# Altium PCB Sensor_board.PcbDoc
Units mil, origin at the board's own origin, x right, y up, seen from the top; angles counter-clockwise.
Board outline 3930 x 1861.13 mil, 2 copper layers (Top Layer, Bottom Layer); 47 components, 36 nets, 152 pads, 31 vias.
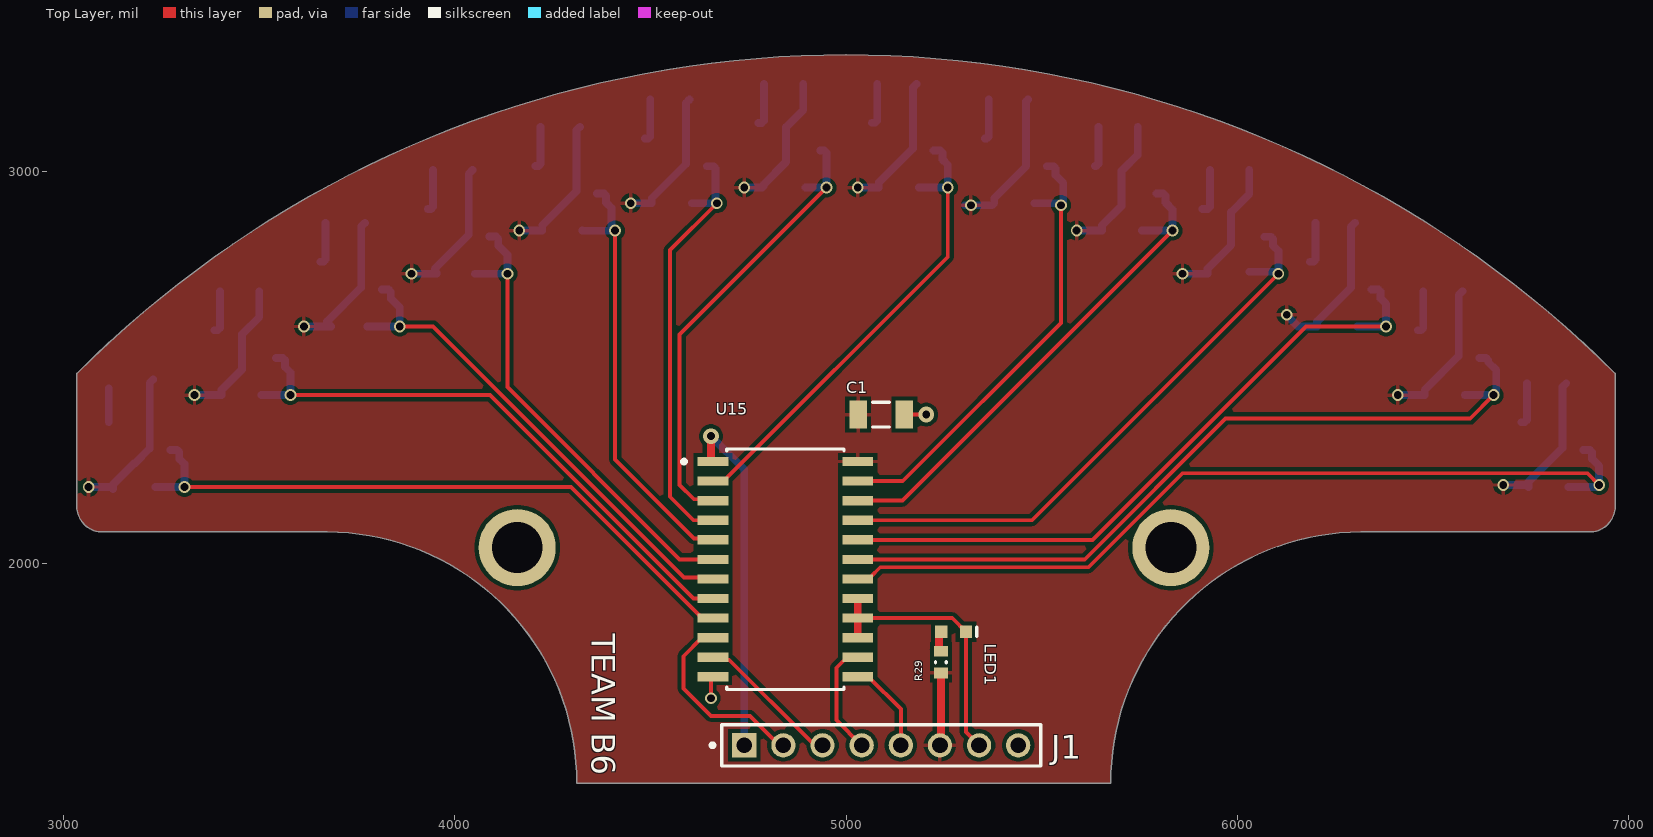
[diagram p0: Top Layer view]
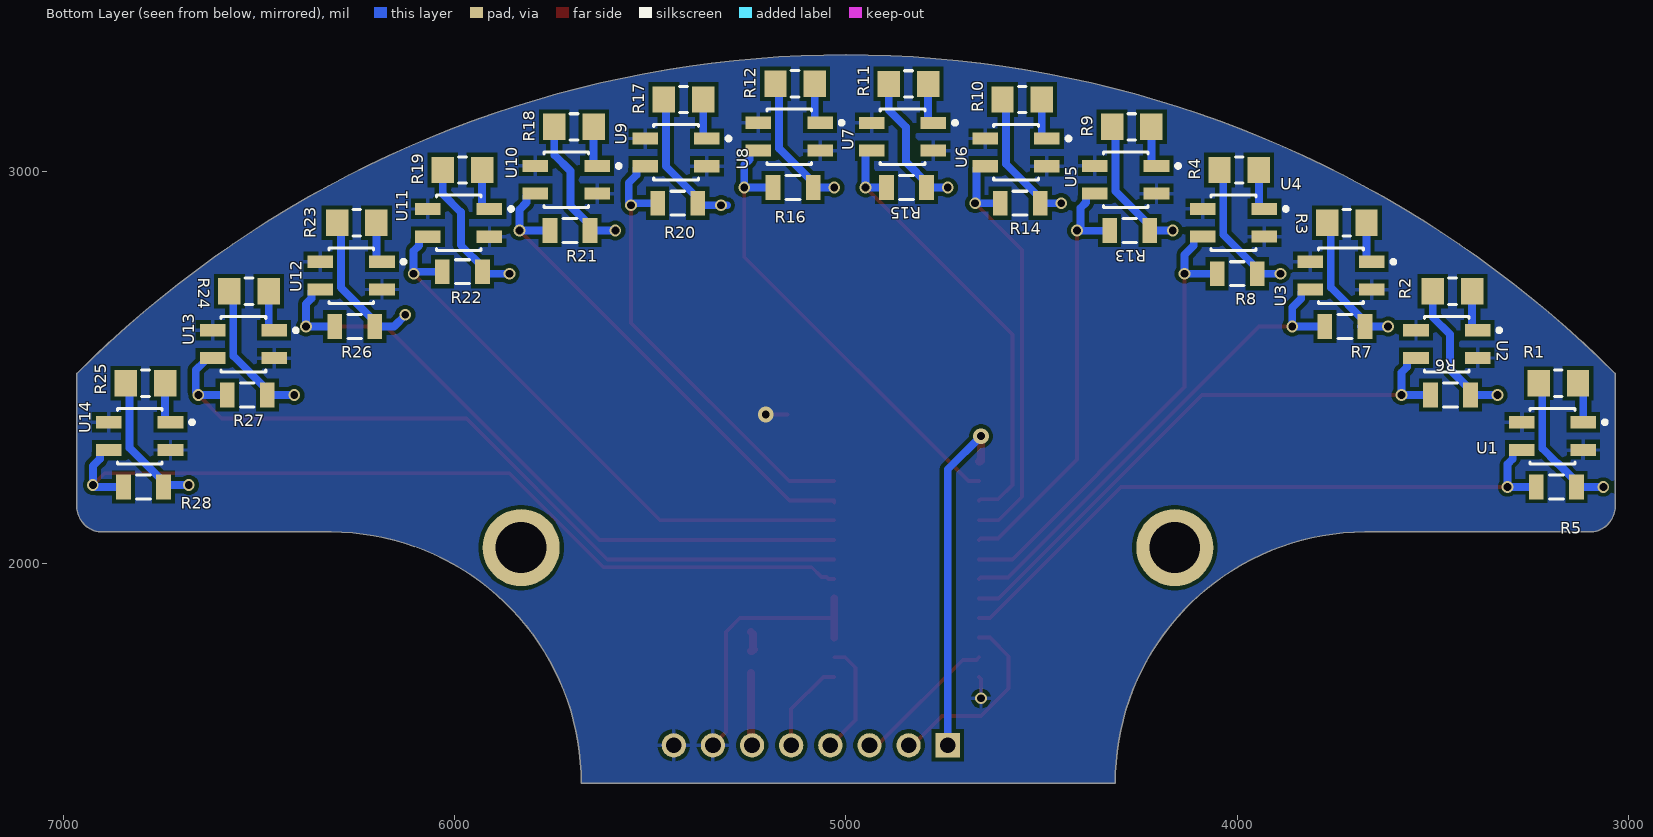
[diagram p1: Bottom Layer view, seen from below]
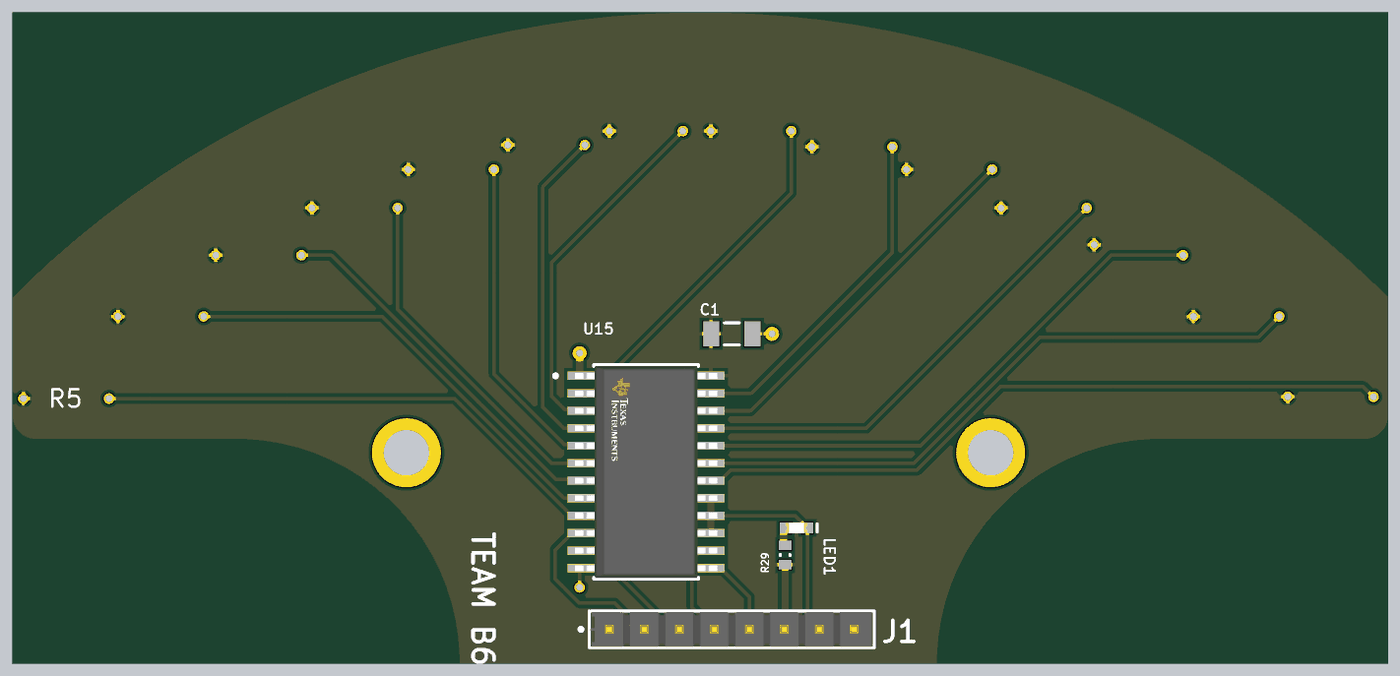
[diagram p2: 3D render of the assembled board from above, using the file's embedded part models]
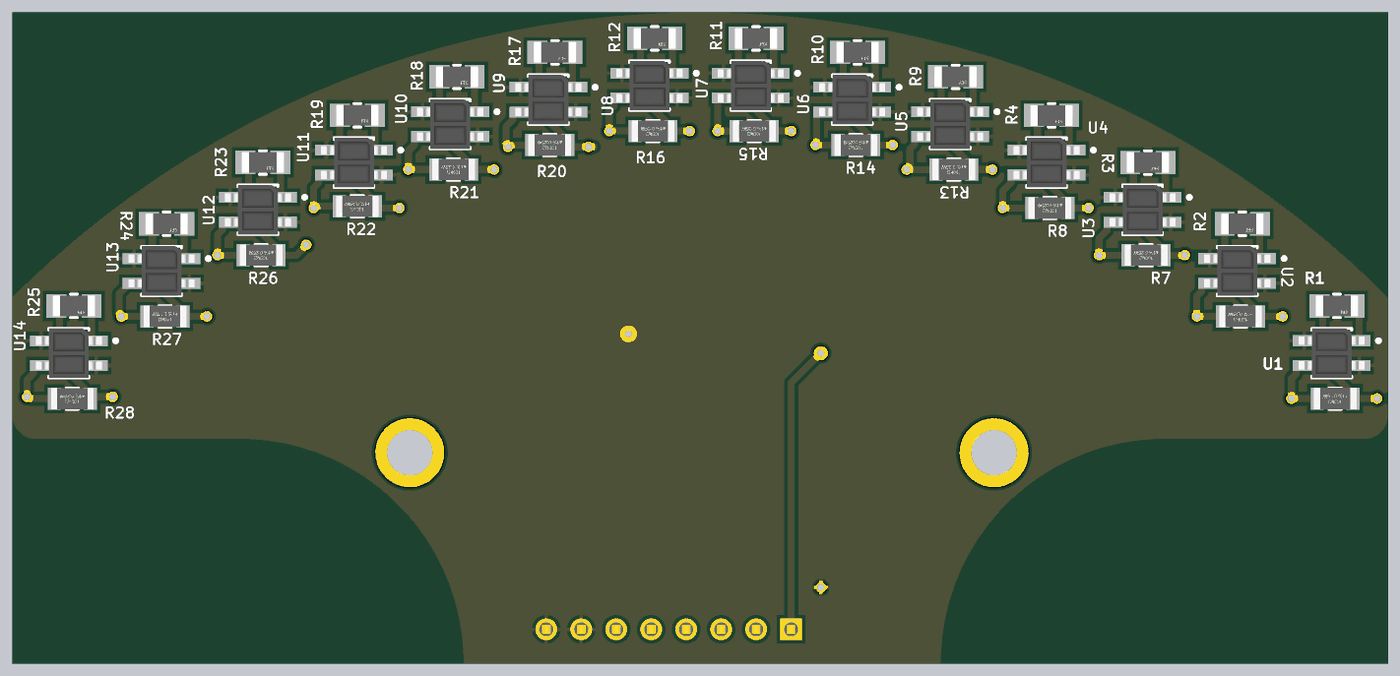
[diagram p3: 3D render of the assembled board from below, using the file's embedded part models]

## Layer stack, top to bottom
Top Solder: solder mask 0.4, Solder Resist, Dk 3.5
Top Layer: signal copper 1.4
Dielectric 1: dielectric 12.6, FR-4, Dk 4.8
Bottom Layer: signal copper 1.4
Bottom Solder: solder mask 0.4, Solder Resist, Dk 3.5

## Board outline
3035,2145 ccw(c3100,2145) 3100,2080 3675,2080 cw(c3672.5,1440.3) 4312.2,1437.8 5676.18,1437.8 cw(c6316.69,1439.49) 6315,2080 6900,2080 ccw(c6900,2145) 6965,2145 6965,2485 ccw(c5000,520) 3035,2485

## Design rules (kind name [scope] priority, off if disabled: settings)
Clearance [All] p1: gap=10 ignorepadtopadclearanceinfootprint=FALSE
PolygonConnect [All] p1: connectstyle=Relief reliefconductorwidth=10 reliefentries=4 polygonreliefangle="90 Angle" airgapwidth=10
RoutingVias [All] p1: holewidth=28 width=50 viastyle="Through Hole" minholewidth=28 minwidth=50 maxholewidth=28 maxwidth=50
SolderMaskExpansion [All] p1: expansion=4 istentingtop=FALSE
SupplyNets "Schematic Supply Nets_15" [InNet('sense_8')] p1: voltage=0.000
SupplyNets "Schematic Supply Nets_14" [InNet('sense_14')] p2: voltage=0.000
SupplyNets "Schematic Supply Nets_13" [InNet('sense_5')] p3: voltage=0.000
SupplyNets "Schematic Supply Nets_12" [InNet('sense_9')] p4: voltage=0.000
SupplyNets "Schematic Supply Nets_11" [InNet('GND')] p5: voltage=0.000
SupplyNets "Schematic Supply Nets_10" [InNet('sense_13')] p6: voltage=0.000
SupplyNets "Schematic Supply Nets_9" [InNet('+5')] p7: voltage=0.000
SupplyNets "Schematic Supply Nets_8" [InNet('sense_6')] p8: voltage=0.000
SupplyNets "Schematic Supply Nets_7" [InNet('sense_3')] p9: voltage=0.000
SupplyNets "Schematic Supply Nets_6" [InNet('sense_1')] p10: voltage=0.000
SupplyNets "Schematic Supply Nets_5" [InNet('sense_12')] p11: voltage=0.000
SupplyNets "Schematic Supply Nets_4" [InNet('sense_2')] p12: voltage=0.000
SupplyNets "Schematic Supply Nets_3" [InNet('sense_4')] p13: voltage=0.000
SupplyNets "Schematic Supply Nets_2" [InNet('sense_7')] p14: voltage=0.000
SupplyNets "Schematic Supply Nets_1" [InNet('sense_11')] p15: voltage=0.000
SupplyNets "Schematic Supply Nets" [InNet('sense_10')] p16: voltage=0.000
Width [All] p1: maxlimit=30 minlimit=10 preferedwidth=10
30 further rules are at their usual default settings.

## Classes and differential pairs
component class board: C1 J1 LED1 R29 U15

## Components (designator, comment, footprint, x,y, rotation, side; value= is the part's Value field where it differs from the comment)
C1 "CAP 100nF 100V 1206(3216)" CAPC1206(3216)150_N 5090,2380 r0 top value=100nF
J1 "TSW-108-08-G-S" FP-TSW-108-08-G-S-MFG 5090,1535 r0 top
LED1 "2V 20mA 0603 Red" 0603_A 5275,1825 r180 top
R1 "RNCP1206FTD200R" FP-RNCP1206-IPC_B 3180,2460 r0 bottom
R2 "RNCP1206FTD200R" FP-RNCP1206-IPC_B 3450.45,2694.84 r0 bottom
R3 "RNCP1206FTD200R" FP-RNCP1206-IPC_B 3720.45,2869.84 r0 bottom
R4 "RNCP1206FTD200R" FP-RNCP1206-IPC_B 3995.45,3004.84 r0 bottom
R5 "CRGCQ1206J10K" FP-CRGCQ1206-IPC_C 3185,2195 r0 bottom value=10KΩ
R6 "CRGCQ1206J10K" FP-CRGCQ1206-IPC_C 3455.45,2429.84 r0 bottom value=10KΩ
R7 "CRGCQ1206J10K" FP-CRGCQ1206-IPC_C 3725.45,2604.84 r0 bottom value=10KΩ
R8 "CRGCQ1206J10K" FP-CRGCQ1206-IPC_C 4000.45,2739.84 r0 bottom value=10KΩ
R9 "RNCP1206FTD200R" FP-RNCP1206-IPC_B 4270,3115 r0 bottom
R10 "RNCP1206FTD200R" FP-RNCP1206-IPC_B 4550,3185 r0 bottom
R11 "RNCP1206FTD200R" FP-RNCP1206-IPC_B 4840.45,3224.84 r0 bottom
R12 "RNCP1206FTD200R" FP-RNCP1206-IPC_B 5130,3225 r0 bottom
R13 "CRGCQ1206J10K" FP-CRGCQ1206-IPC_C 4275,2850 r0 bottom value=10KΩ
R14 "CRGCQ1206J10K" FP-CRGCQ1206-IPC_C 4555,2920 r0 bottom value=10KΩ
R15 "CRGCQ1206J10K" FP-CRGCQ1206-IPC_C 4845.45,2959.84 r0 bottom value=10KΩ
R16 "CRGCQ1206J10K" FP-CRGCQ1206-IPC_C 5135,2960 r0 bottom value=10KΩ
R17 "RNCP1206FTD200R" FP-RNCP1206-IPC_B 5415,3185 r0 bottom
R18 "RNCP1206FTD200R" FP-RNCP1206-IPC_B 5695,3115 r0 bottom
R19 "RNCP1206FTD200R" FP-RNCP1206-IPC_B 5980,3005 r0 bottom
R20 "CRGCQ1206J10K" FP-CRGCQ1206-IPC_C 5430,2920 r0 bottom value=10KΩ
R21 "CRGCQ1206J10K" FP-CRGCQ1206-IPC_C 5705,2850 r0 bottom value=10KΩ
R22 "CRGCQ1206J10K" FP-CRGCQ1206-IPC_C 5980,2745 r0 bottom value=10KΩ
R23 "RNCP1206FTD200R" FP-RNCP1206-IPC_B 6250,2870 r0 bottom
R24 "RNCP1206FTD200R" FP-RNCP1206-IPC_B 6525,2695 r0 bottom
R25 "RNCP1206FTD200R" FP-RNCP1206-IPC_B 6790,2460 r0 bottom
R26 "CRGCQ1206J10K" FP-CRGCQ1206-IPC_C 6255,2605 r0 bottom value=10KΩ
R27 "CRGCQ1206J10K" FP-CRGCQ1206-IPC_C 6529.68,2429.84 r0 bottom value=10KΩ
R28 "CRGCQ1206J10K" FP-CRGCQ1206-IPC_C 6794.68,2194.84 r0 bottom value=10KΩ
R29 "150R 5% 0603(1608)" RESC0603(1608)_L 5242.44,1747.56 r270 top value="150.00 Ohm"
U1 "QRE1113GR" FP-100CY-MFG 3195,2325 r0 bottom
U2 "QRE1113GR" FP-100CY-MFG 3465,2560 r0 bottom
U3 "QRE1113GR" FP-100CY-MFG 3735.45,2734.84 r0 bottom
U4 "QRE1113GR" FP-100CY-MFG 4010,2870 r0 bottom
U5 "QRE1113GR" FP-100CY-MFG 4285.45,2979.84 r0 bottom
U6 "QRE1113GR" FP-100CY-MFG 4565.45,3049.84 r0 bottom
U7 "QRE1113GR" FP-100CY-MFG 4855.45,3089.84 r0 bottom
U8 "QRE1113GR" FP-100CY-MFG 5145,3090 r0 bottom
U9 "QRE1113GR" FP-100CY-MFG 5434.09,3049.84 r0 bottom
U10 "QRE1113GR" FP-100CY-MFG 5714.68,2979.84 r0 bottom
U11 "QRE1113GR" FP-100CY-MFG 5989.68,2869.84 r0 bottom
U12 "QRE1113GR" FP-100CY-MFG 6264.23,2735 r0 bottom
U13 "QRE1113GR" FP-100CY-MFG 6539.68,2559.84 r0 bottom
U14 "QRE1113GR" FP-100CY-MFG 6804.68,2324.84 r0 bottom
U15 "CD74HC4067M96" FP-DW0024A-MFG 4845,1985 r0 top

## Footprints (in the part's own frame and the unit in brackets; to place one, negate y for a bottom-side part, rotate by r counter-clockwise, add the part's x,y. Pads: shape width x height; smd on the part's side, far side on the other; paste and mask are expansions set on the pad)
0603_A [mm] "Chip LED, 2-Leads, Body 1.6x0.8mm, IPC Medium Density"
  rect 0.8x0.8 smd: 1(-0.8,0) 2(0.8,0)
  silkscreen extent -1.5,-0.3 -1.5,0.3, body extent -0.8,-0.4 0.8,0.4, height 0.7
CAPC1206(3216)150_N [mm] "Chip Capacitor, Body 3.2x1.6mm, Height 1.5mm, IPC Medium Density"
  rect 1.15x1.8 smd: 1(-1.5,0) 2(1.5,0)
  silkscreen extent -0.55,-0.8 0.55,0.8, body extent -1.7,-0.9 1.7,0.9, height 1.5
FP-100CY-MFG [mm]
  rect 1.66x0.79 smd paste+0 mask+0: 1(-2,-0.9) 2(2,-0.9) 3(2,0.9) 4(-2,0.9)
  silkscreen extent -3.52,-1.8 1.45,1.8, body extent -2.4,-1.8 2.4,1.8, height 1.85
FP-CRGCQ1206-IPC_C [mil]
  rect 37.64x63.38 smd paste+0 mask+0: 1(-51.22,0) 2(51.22,0)
  silkscreen extent -18,-31 18,31, body extent -61,-31 61,31, height 26
FP-DW0024A-MFG [mm]
  rect 2x0.6 smd paste-1000 mask+0: 1(-4.7,6.985) 2(-4.7,5.715) 3(-4.7,4.445) 4(-4.7,3.175) 5(-4.7,1.905) 6(-4.7,0.635) 7(-4.7,-0.635) 8(-4.7,-1.905) 9(-4.7,-3.175) 10(-4.7,-4.445) 11(-4.7,-5.715) 12(-4.7,-6.985) 13(4.7,-6.985) 14(4.7,-5.715) 15(4.7,-4.445) 16(4.7,-3.175) 17(4.7,-1.905) 18(4.7,-0.635) 19(4.7,0.635) 20(4.7,1.905) 21(4.7,3.175) 22(4.7,4.445) 23(4.7,5.715) 24(4.7,6.985)
  silkscreen extent -6.7,-7.8 3.8,7.8, body extent -5.8,-7.98 5.8,7.98, height 0.25
FP-RNCP1206-IPC_B [mil]
  rect 57.26x67.17 smd paste+0 mask+0: 1(-50.23,0) 2(50.23,0)
  silkscreen extent -10,-34 10,34, body extent -61,-30 61,30, height 26
FP-TSW-108-08-G-S-MFG [mm]
  rect 1.57x1.57 hole 1.02 paste-2539.97 mask+0: 1(-8.89,0)
  round 1.57 hole 1.02 paste-2539.97 mask+0: 2(-6.35,0) 3(-3.81,0) 4(-1.27,0) 5(1.27,0) 6(3.81,0) 7(6.35,0) 8(8.89,0)
  silkscreen extent -11.07,-1.34 10.35,1.34, body extent -10.45,-1.44 10.45,1.44, height 0.25
RESC0603(1608)_L [mm] "Chip Resistor, Body 1.6x0.8mm, IPC High Density"
  rect 0.7x0.9 smd: 1(-0.7,0) 2(0.7,0)
  silkscreen extent -0.05,-0.35 0.05,0.35, body extent -0.85,-0.47 0.85,0.47, height 0.6

## Part data
C1: library part CMP-1037-04212-1, "CAP 100nF 100V ±10% 1206 (3216 Metric) Thickness 1.45mm SMD", Case-EIA=1206, Case-Metric=3216, Rated Voltage="100 V", Tolerance=Â±10%, Max Thickness="1.45 mm", Technology=SMT
J1: library part CMP-02766-000001-1, "CONN HEADER VERT 8POS 2.54MM", Manufacturer=Samtec, Temperature="-55°C to +125°C", Temperature Range High=+125°C, Temperature Range Low=-55°C, Automotive=No, Category=Conn, ComponentLink2Description=Datasheet, ComponentLink2URL=http://suddendocs.samtec.com/catalog_english/tsw_th.pdf, Conn Gender=Male, Conn Orientation=Straight, Contact Material=Gold,Nickel, Device Class L1=Connectors, Device Class L2="Headers and Wire Housings", Device Class L3=unset, Digikey Description="CONN HEADER VERT 8POS 2.54MM", Footprint Url=http://suddendocs.samtec.com/prints/tsw-xxx-xx-x-x-xx-xxx-footprint.pdf, Height=8.71mm, Lead Free=Yes, Manufacturer Part Number=TSW-108-08-G-S, Mouser Description="TSW - Samtec 2.54mm Pin Header 13.46mm Overall Pin Length 5.08mm Tail", Number Of Contacts=8, Number Of Rows=1, Octopart=https://octopart.com/tsw-108-08-g-s-samtec-272653, Package=TSW-108-08-G-S, Pitch=2.54mm, RoHS=TRUE
LED1: library part CMP-1426-00001-1, "SMD mono-color Chip LED, WL-SMCW, Red", Color=Red, Manufacturer="Wuerth Elektronik", PartNumber=150060RS75000, ComponentLink1Description="Manufacturer URL", ComponentLink1URL=http://www.we-online.com, ComponentLink2Description=Datasheet, ComponentLink2URL=http://katalog.we-online.com/led/datasheet/150060RS75000.pdf, PackageReference=0603_A
R1 R2 R3 R4 R9 R10 R11 R12 R17 R18 R19 R23 R24 R25: library part CMP-26527-001516-1, "200Ω ±1% 0.5W 1206 High Power Anti-Sulfur Thin Film Chip Resistor", Case Code (Imperial)=1206, Case Code (Metric)=3216, Max Operating Temperature=155°C, Max Power Dissipation=500mW, Min Operating Temperature=-55°C, Resistance=200R, Resistor Type="Thin Film", Temperature Coefficient=100ppm/°C, Tolerance=1%, Case/Package=1206, Features="Moisture Resistant", Height=0.024inch, Lead Free="Lead Free", Length=0.122inch, Mount="Surface Mount", Number of Terminations=2, Packaging="Tape and Reel", RoHS Compliant=Yes, Series=RNCP, Width=0.059inch
R5 R6 R7 R8 R13 R14 R15 R16 R20 R21 R22 R26 R27 R28: library part CMP-03211-002305-1, "CRGCQ1206 10KΩ 0.25W 5% ±100ppm/°C 200V", Ambient Temperature Range High=+70°C, Manufacturer="TE Connectivity", Package=CRGCQ1206, Power Rating=0.25W, Resistance=10KΩ, Temperature="-55°C to +155°C", Temperature Coefficient=±100ppm/°C, Temperature Range High=+155°C, Temperature Range Low=-55°C, Tolerance=0.05, Voltage Rating=200V, Automotive=Yes, Automotive Grade="Grade 914", Category=Res, ComponentLink2Description=Datasheet, ComponentLink2URL=https://www.te.com/commerce/DocumentDelivery/DDEController?Action=showdoc&DocId=Data+Sheet%7F1773204-3%7F1%7Fpdf%7FEnglish%7FENG_DS_1773204-3_1.pdf%7F4-2176347-923, Composition="Thick Film", Device Class L1="Passive Components", Device Class L2=Resistors, Device Class L3="Chip SMD Resistors", Height=0.65mm, Ipc Land Pattern Name=RESC310155X55, Lead Free=Yes, Manufacturer Part Number=CRGCQ1206J10K, Octopart=https://octopart.com/crgcq1206j10k-te+connectivity-91018305, RoHS=TRUE, Series=CRGCQ
R29: library part CMP-1012-00054-1, "150R 0.1W 5% 0603 (1608 Metric)  SMD", Case-EIA=0603, Case-Metric=1608, Power="0.1 W", Tolerance="5 %", Technology=SMT
U1 U2 U3 U4 U5 U6 U7 U8 U9 U10 U11 U12 U13 U14: library part CMP-2000-06919-2, "SENSOR OPTO TRANS REFL SMD PHOTO", Case/Package=SMD/SMT, Collector Emitter Breakdown Voltage=30V, Forward Current=50mA, Forward Voltage=1.2V, Max Collector Current=20mA, Max Operating Temperature=85°C, Max Power Dissipation=75mW, Min Operating Temperature=-40°C, Operating Supply Voltage=1.7V, Package Quantity=1000, Reverse Breakdown Voltage=5V, Collector Emitter Voltage (VCEO)=30V, Contact Plating=Tin, Fall Time=20us, Height=1.7mm, Input Current=50mA, Lead Free="Lead Free", Length=3.6mm, Max Breakdown Voltage=30V, Mount="Surface Mount", Number of Channels=1, Number of Elements=1, Number of Pins=4, Output Type=Phototransistor, Packaging="Tape and Reel", Power Dissipation=75mW, Radiation Hardening=No, REACH SVHC="No SVHC", Response Time=20us, Reverse Voltage (DC)=5V, Rise Time=20us, Sensing Distance=0.197inch, Wavelength=940nm, Weight=0.078g, Width=2.9mm
U15: library part CMP-04901-000007-1, "IC MUX/DEMUX 1X16 24SOIC", Ambient Temperature Range High=+125°C, Ambient Temperature Range Low=-55°C, Manufacturer="Texas Instruments", Max Junction Temp=+150°C, Max Supply Voltage=6V, Min Supply Voltage=2V, Package=DW0024A, Quiescent Current=8uA, Temperature="-55°C to +125°C", Automotive=No, Category=IC, ComponentLink2Description=Datasheet, ComponentLink2URL=http://www.ti.com/lit/ds/symlink/cd74hc4067.pdf, Device Class L1="Integrated Circuits (ICs)", Device Class L2="Logic ICs", Device Class L3=Multiplexers, Digikey Description="IC MUX/DEMUX 1X16 24SOIC", Height=2.65mm, Ipc Land Pattern Name=SOIC127P1030X265-24, Lead Free=Yes, Logic Function Desc=Non-Inverting, Manufacturer Part Number=CD74HC4067M96, Mouser Description="Multiplexer Switch ICs Hi-Spd CMOS 16Ch Anl Mltplxr/Demltplxr", Number Of Circuits=1, Number Of Inputs=16, Number Of Outputs=1, Octopart=https://octopart.com/cd74hc4067m96-texas+instruments-722802, Propagation Delay=6ns, RoHS=TRUE, Standoff Height=0.1mm, Temperature Range High=+125°C, Temperature Range Low=-55°C

## Free pads (board coordinates)
  round 196.85 hole 130 unplated: M3(4160,2040) M3(5830,2040)

## Via types
v1: diameter 30, hole 20, Top Layer to Bottom Layer, 29 vias
v2: diameter 40, hole 20, Top Layer to Bottom Layer, 2 vias

## Nets (pads, with @x,y where several pads share a name; then routed paths per layer and width w, separated by ;. In a path a pad name is that pad's centre, name@x,y a point inside that pad or via, vN(x,y) a via of type N, cw(c..) or ccw(c..) an arc to the next point about the centre after c; other vN are vias at no path point)
+5: C1.1 J1.6 R1.2 R2.2 R3.2 R4.2 R5.1 R6.1 R7.1 R8.1 R9.2 R10.2 R11.2 R12.2 R13.1 R14.1 R15.1 R16.1 R17.2 R18.2 R19.2 R20.1 R21.1 R22.1 R23.2 R24.2 R25.2 R26.1 R27.1 R28.1 R29.2 U15.24 | length 5379.7
  Top Layer w20: J1.6 5242.44,1537.44 R29.2
  Bottom Layer w20: v1(3065,2195) R5.1@3122.01,2195 ; R5.1@3127.01,2190 3127.01,2201.1 3181.07,2255.16 3182.59,2255.16 3221.06,2293.64 3221.06,2460.83 R1.2@3230.23,2470 ; v1(3335.45,2429.84) R6.1 3404.23,2442.71 3456.86,2495.34 3456.86,2585.07 3500.68,2628.89 R2.2 ; v1@3615.45,2604.84 R7.1 3684.23,2604.84 3680.46,2609.68 3674.23,2617.71 3761.51,2704.99 3761.51,2860.67 R3.2 ; v1@3885.45,2739.84 R8.1 3954.23,2739.84 3953.57,2741.53 3949.23,2752.71 4036.06,2839.54 4036.06,2995.22 R4.2 ; v1(4165,2850) R13.1 4223.78,2862.87 4311.51,2950.6 4311.51,3106.28 R9.2 ; v1(4450,2920) R14.1 4503.78,2932.87 4591.51,3020.6 4591.51,3176.28 R10.2 ; v1(4740,2960) 4785.41,2960 4789.06,2963.66 4789.06,2967.54 4846.86,3025.34 4846.86,3114.46 4890.68,3158.27 R11.2 ; v1(5030,2960) R16.1 5083.78,2972.87 5171.06,3060.16 5171.06,3215.83 R12.2 ; v1@5304.09,2914.84 v1(5319.09,2914.84) 5373.61,2914.84 R20.1 5378.78,2932.87 5460.15,3014.24 5460.15,3179.92 R17.2 ; v1(5589.23,2850) R21.1 5653.78,2862.87 5703.91,2913.01 5703.91,3002.28 5745.23,3043.59 R18.2 ; v1(5859.68,2739.84) 5923.61,2739.84 5923.61,2752.71 5983.91,2813.01 5983.91,2897.28 6030.23,2943.59 R19.2 ; v1(6126.05,2634.84) 6126.05,2633.75 6154.96,2604.84 6203.61,2604.84 R26.1 6203.78,2617.87 6290.29,2704.39 6290.29,2860.06 R23.2 ; v1(6409.68,2429.84) R27.1 6478.46,2442.71 6565.74,2529.99 6565.74,2685.51 R24.2 ; v1(6679.23,2200) R28.1@6738.29,2200 ; R28.1 6743.46,2207.71 6830.74,2294.99 6830.74,2450.51 R25.2
  other v1: 3615,2605 3890,2740
GND: C1.2 J1.7 J1.8 LED1.1 U1.2 U1.4 U2.2 U2.4 U3.2 U3.4 U4.2 U4.4 U5.2 U5.4 U6.2 U6.4 U7.2 U7.4 U8.2 U8.4 U9.2 U9.4 U10.2 U10.4 U11.2 U11.4 U12.2 U12.4 U13.2 U13.4 U14.2 U14.4 U15.12 U15.15 U15.16 U15.17 | length 792.8
  Top Layer w10: v1(4655,1655) 4655,1705.04 U15.12 ; U15.16 5271.5,1860 LED1.1 5306.5,1568.5 J1.7 ; C1.2 v2@5190,2380
  Top Layer w20: U15.15 U15.16 U15.17
  other v2: 5205,2380
MUX_OUTPUT: J1.1 U15.1 | length 894.1
  Top Layer w20: v2(4655,2325) 4655,2261.81 4656.81,2260 U15.1
  Bottom Layer w20: v2(4655,2325) 4740,2240 J1.1
NetLED1_2: LED1.2 R29.1 | length 58
  Top Layer w20: R29.1 5239.88,1775.12 5235,1780 5237.76,1782.76 5237.76,1819.25 LED1.2
NetR1_1: R1.1 U1.1 | length 86.1
  Bottom Layer w20: U1.1 R1.1@3116.26,2446.54
NetR2_1: R2.1 U2.1 | length 110.1
  Bottom Layer w20: U2.1 3394.67,2595.43 3400.22,2600.98 R2.1
NetR3_1: R3.1 U3.1 | length 109.8
  Bottom Layer w20: U3.1 3664.67,2770.27 3670.22,2775.82 R3.1
NetR4_1: R4.1 U4.1 | length 110.1
  Bottom Layer w20: U4.1 3939.67,2905.43 3945.22,2910.98 R4.1
NetR9_1: R9.1 U5.1 | length 109.5
  Bottom Layer w20: U5.1 4214.22,3015.27 4219.77,3020.82 R9.1
NetR10_1: R10.1 U6.1 | length 109.5
  Bottom Layer w20: U6.1 4494.22,3085.27 4499.77,3090.82 R10.1
NetR11_1: R11.1 U7.1 | length 109.8
  Bottom Layer w20: U7.1 4784.67,3125.27 4790.22,3130.82 R11.1
NetR12_1: R12.1 U8.1 | length 109.8
  Bottom Layer w20: U8.1 5074.22,3125.43 5079.77,3130.98 R12.1
NetR17_1: R17.1 U9.1 | length 105.9
  Bottom Layer w20: U9.1 5359.22,3085.27 5364.77,3090.82 R17.1
NetR18_1: R18.1 U10.1 | length 105.3
  Bottom Layer w20: U10.1 5639.22,3015.27 5644.77,3020.82 R18.1
NetR19_1: R19.1 U11.1 | length 115.3
  Bottom Layer w20: U11.1 5924.22,2905.27 5929.77,2910.82 R19.1
NetR23_1: R23.1 U12.1 | length 110.6
  Bottom Layer w20: U12.1 6194.22,2770.43 6199.77,2775.98 R23.1
NetR24_1: R24.1 U13.1 | length 110.3
  Bottom Layer w20: U13.1 6469.22,2595.27 6474.77,2600.82 R24.1
NetR25_1: R25.1 U14.1 | length 110.3
  Bottom Layer w20: U14.1 6734.22,2360.27 6739.77,2365.82 R25.1
SENS_MUX_A: J1.2 U15.10 | length 492.3
  Top Layer w10: U15.10 4632.4,1810 4585,1762.6 4585,1680 4655,1610 4755,1610 4830,1535 J1.2
SENS_MUX_B: J1.3 U15.11 | length 373.2
  Top Layer w10: U15.11 4666.77,1753.19 4701.81,1753.19 4910.09,1544.91 4930.09,1544.91 J1.3
SENS_MUX_C: J1.4 U15.14 | length 290.3
  Top Layer w10: U15.14 5002.48,1760 4975.67,1733.19 4975.67,1599.33 J1.4
SENS_MUX_D: J1.5 U15.13 | length 236.7
  Top Layer w10: U15.13 5057.6,1710 5140,1627.6 J1.5
sense_1: R5.2 U1.3 U15.9 | length 1687.1
  Top Layer w10: v1(3310,2195) 4297.4,2195 4632.4,1860 U15.9
  Bottom Layer w20: R5.2 v1(3310,2195) ; U1.3 3290.87,2289.57 3296.42,2284.02 3296.42,2266.89 3310,2253.31 v1@3310,2190
sense_2: R6.2 U2.3 U15.8 | length 1488.6
  Top Layer w10: v1(3580.45,2429.84) 4090.85,2429.84 4610.69,1910 U15.8
  Bottom Layer w20: R6.2 v1(3580.45,2429.84) 3580.45,2487.86 3566.42,2501.89 3566.42,2519.02 3560.87,2524.57 U2.3
sense_3: R7.2 U3.3 U15.7 | length 1273.7
  Top Layer w10: v1(3860,2605) 3945,2605 4586.59,1963.41 4656.56,1963.41 U15.7
  Bottom Layer w20: R7.2@3776.83,2605 v1(3860,2605) 3860,2653.6 3836.87,2676.73 3836.87,2693.85 3831.32,2699.4 U3.3
sense_4: R8.2 U4.3 U15.6 | length 1204.1
  Top Layer w10: v1(4135,2740) 4135,2450 4575,2010 U15.6
  Bottom Layer w20: R8.2@4051.83,2740 v1(4135,2740) 4135,2788.31 4111.42,2811.89 4111.42,2817.3 4111.42,2829.01 4105.87,2834.57 U4.3
sense_5: R13.2 U5.3 U15.5 | length 1113.8
  Top Layer w10: v1(4410,2850) 4410,2265 4611.45,2063.55 4656.41,2063.55 U15.5
  Bottom Layer w20: R13.2 4326.39,2849.84 4400.45,2849.84 4400.45,2908.14 4386.87,2921.73 4386.87,2938.85 4381.32,2944.4 U5.3
sense_6: R14.2 U6.3 U15.4 | length 1113.4
  Top Layer w10: U15.4 4610,2110 4550,2170 4550,2800 v1(4670,2920)
  Bottom Layer w20: R14.2 v1(4670,2920) 4670,2922.71 4666.87,2925.84 4666.87,3008.85 4661.32,3014.4 U6.3
sense_7: R15.2 U7.3 U15.3 | length 1177.1
  Top Layer w10: U15.3 4656.41,2163.55 4611.45,2163.55 4575,2200 4575,2585 v1(4950,2960)
  Bottom Layer w20: R15.2 v1@4950,2959.84 ; U7.3 4944.45,3054.4 4950,3048.85 v1(4950,2960)
sense_8: R16.2 U8.3 U15.2 | length 1208.1
  Top Layer w10: U15.2 4687.52,2210 5260,2782.48 v1(5260,2960)
  Bottom Layer w20: R16.2 v1(5260,2960) 5260,3018.31 5246.42,3031.89 5246.42,3049.02 5240.87,3054.57 U8.3
sense_9: R20.2 U9.3 U15.23 | length 1186.7
  Top Layer w10: U15.23 5145,2210 5549.09,2614.09 v1(5549.09,2914.84)
  Bottom Layer w20: R20.2 5541.22,2920 5546.38,2914.84 v1(5549.09,2914.84) 5549.09,2917.54 5555,2923.45 5555,2972.23 5535.51,2991.73 5535.51,3008.85 5529.96,3014.4 U9.3
sense_10: R21.2 U10.3 U15.22 | length 1296.4
  Top Layer w10: U15.22@5030,2155 5035,2160 5144.23,2160 v1(5834.23,2850) ; U15.22@5030.04,2155.04 U15.22
  Bottom Layer w20: R21.2 v1(5834.23,2850) 5834.23,2903.59 5816.1,2921.73 5816.1,2938.85 5810.55,2944.4 U10.3
sense_11: R22.2 U11.3 U15.21 | length 1530.7
  Top Layer w10: U15.21 5474.84,2110 v1(6104.68,2739.84)
  Bottom Layer w20: R22.2 6096.81,2745 6101.97,2739.84 v1(6104.68,2739.84) 6104.68,2798.14 6091.1,2811.73 6091.1,2828.85 6085.55,2834.4 U11.3
sense_12: R26.2 U12.3 U15.20 | length 1768.8
  Top Layer w10: U15.20 5630,2060 6174.84,2604.84 v1(6379.68,2604.84)
  Bottom Layer w20: R26.2 6306.39,2604.84 v1(6379.68,2604.84) 6379.68,2662.86 6365.65,2676.89 6365.65,2694.02 6360.1,2699.57 U12.3
sense_13: R27.2 U13.3 U15.19 | length 1997.3
  Top Layer w10: U15.19 5610,2010 5970,2370 6594.84,2370 v1(6654.68,2429.84)
  Bottom Layer w20: R27.2 v1(6654.68,2429.84) 6654.68,2432.54 6661.2,2439.07 6661.2,2493.8 6641.1,2513.9 6641.1,2518.85 6635.55,2524.4 U13.3
sense_14: R28.2 U14.3 U15.18 | length 2215.3
  Top Layer w10: U15.18 5045,1960 5050,1965 5062.6,1965 5087.6,1990 5619.59,1990 5859.59,2230 6894.23,2230 v1(6924.23,2200)
  Bottom Layer w20: R28.2 6916.36,2194.84 6921.52,2200 v1(6924.23,2200) 6924.23,2248.59 6906.1,2266.73 6906.1,2283.85 6900.55,2289.4 U14.3

## Polygon pours and split planes (outlines as drawn)
GND on Bottom Layer "GND_L02_P001" (solid, pour order 1): 3035,2145 ccw(c3100,2145) 3100,2080 3675,2080 cw(c3672.5,1440.3) 4312.2,1437.8 5676.18,1437.8 cw(c6316.69,1439.49) 6315,2080 6900,2080 ccw(c6900,2145) 6965,2145 6965,2485 ccw(c5000,520) 3035,2485
+5 on Top Layer "+5_L01_P000" (solid, pour order 0): 3035,2145 ccw(c3100,2145) 3100,2080 3675,2080 cw(c3672.5,1440.3) 4312.2,1437.8 5676.18,1437.8 cw(c6316.69,1439.49) 6315,2080 6900,2080 ccw(c6900,2145) 6965,2145 6965,2485 ccw(c5000,520) 3035,2485

## Silkscreen, mask and mechanical layers (free items; w line width, h text height)
Top Overlay:
  text "TEAM B6" at 4350,1820 h60 r270
Mechanical 1:
  lines w10: 5000,1440 5002.2,1437.8 5676.18,1437.8 cw(c6316.69,1439.49) 6315,2080 6900,2080 ccw(c6900,2145) 6965,2145 ; 5001.18,1437.8 4312.2,1437.8 ccw(c3672.5,1440.3) 3675,2080 3100,2080 cw(c3100,2145) 3035,2145 3035,2485 cw(c5000,520) 6965,2485 6965,2150